# Altium PCB PIPOCPUD_2006.PCBDOC (part 5 of 10)
Units mm, origin at the board's own origin, x right, y up, seen from the top; angles counter-clockwise.
Board outline 179.96 x 114.94 mm, 2 copper layers (Top Layer, Top, Bottom Layer, Bottom), stack 1.341 mm thick; 247 components, 222 nets, 910 pads, 491 vias.
Unrouted connection lines stored in the file: 2.
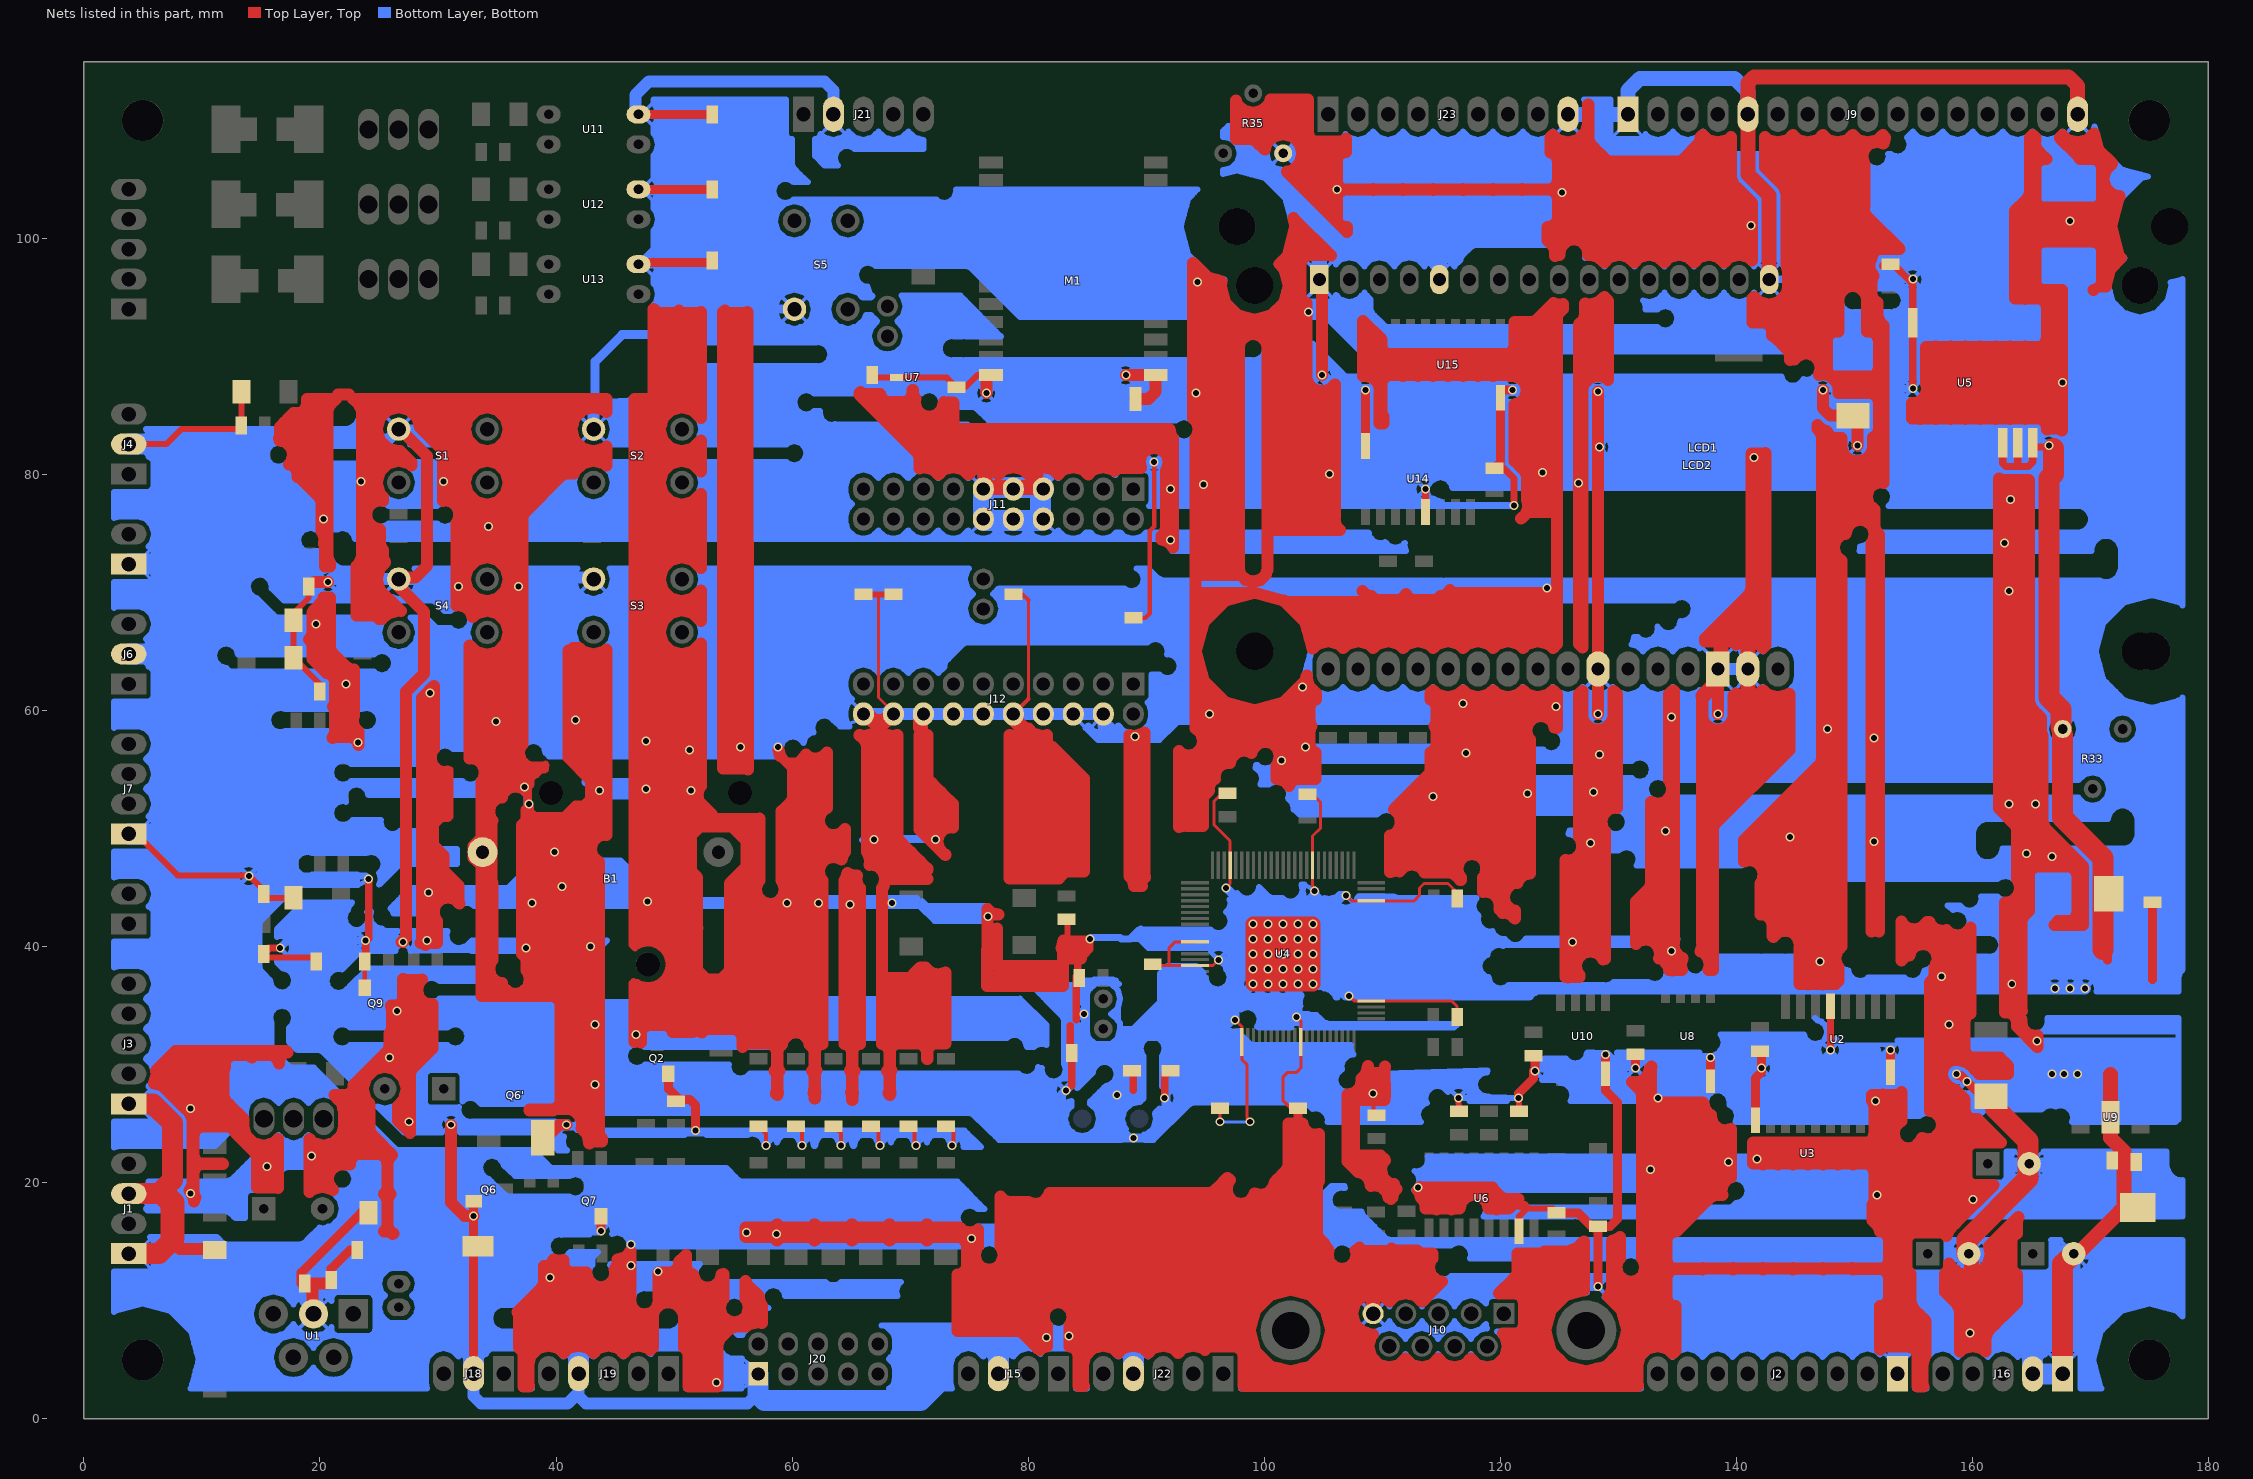
[diagram p5: the nets of this part, all layers, seen from the top]

## Via types
v1: diameter 0.762, hole 0.508, Top Layer, Top to Bottom Layer, Bottom, 489 vias
v2: diameter 0.864, hole 0.813, Top Layer, Top to Bottom Layer, Bottom, 2 vias

## Nets (pads, with @x,y where several pads share a name; then routed paths per layer and width w, separated by ;. In a path a pad name is that pad's centre, name@x,y a point inside that pad or via, vN(x,y) a via of type N, cw(c..) or ccw(c..) an arc to the next point about the centre after c; other vN are vias at no path point) (continued)
GND: (continued)
  Top Layer, Top w1.778: J1.1@3.81,13.97 6.35,13.97 6.985,14.605 7.62,15.24 7.62,18.288 6.858,19.05 6.35,19.05 ; J1.3@3.81,19.05 6.02,19.05 6.35,19.05 ; J3.1@3.81,26.67 5.842,26.67 7.493,25.019 7.493,20.193 6.35,19.05 ; C37.2@159.69,13.97 159.512,13.97 159.512,15.113 164.719,20.32 164.719,21.463 164.719,21.514 C40.2@164.795,21.59 164.719,21.666 164.719,21.717 164.719,23.495 161.925,26.289 161.925,27.305 C25.2@161.544,27.305 ; 166.878,82.169 166.878,80.01 166.497,79.629 166.497,61.087 167.513,60.071 R33.3@167.513,58.547 ; J16.1@167.64,3.785 167.64,13.081 C38.2@168.58,13.97 ; R33.3@167.64,57.912 167.64,50.927 171.069,47.498 171.069,39.751
  Bottom Layer, Bottom w0.254: v1(96.266,25.146) v1(98.806,25.146) ; 98.425,38.862 98.552,38.862 v1(99.06,39.37) ; 102.743,34.544 102.743,35.052 ; 148.819,31.75 154.051,31.75 ; 149.098,31.623 153.416,31.623 152.375,31.623 ; 152.654,31.445 152.654,31.623
  Bottom Layer, Bottom w0.305: J1.3@4.851,18.593 5.461,17.983 ; J1.3@4.851,19.482 5.486,20.091 ; J6.2@4.851,64.313 5.461,63.703 ; J6.2@4.851,65.202 5.461,65.811 ; J4.2@4.851,82.093 5.461,81.483 ; J4.2@4.851,82.982 5.461,83.591 ; J1.1@5.156,13.233 5.715,12.649 ; J1.1@5.156,14.707 5.715,15.265 ; J3.1@5.156,25.933 5.715,25.349 ; J3.1@5.156,27.407 5.715,27.965 ; J7.1@5.156,48.793 5.715,48.209 ; J7.1@5.156,50.267 5.715,50.825 ; J5.1@5.156,71.653 5.715,71.069 ; J5.1@5.156,73.127 5.715,73.685 ; 18.136,7.544 U1.3@18.821,8.23 ; 18.136,10.16 U1.3@18.821,9.474 ; U1.3@20.066,8.23 20.752,7.544 ; U1.3@20.066,9.474 20.752,10.16 ; 25.527,69.977 S4.1@26.162,70.612 ; 25.527,82.677 S1.1@26.162,83.312 ; 25.527,84.938 S1.1@26.162,84.303 ; S4.1@27.153,70.612 27.788,69.977 ; S1.1@27.153,83.312 27.788,82.677 ; S1.1@27.153,84.303 27.788,84.938 ; 31.953,5.461 J18.2@32.563,4.851 ; J18.2@33.452,4.851 34.061,5.461 ; 40.843,5.461 J19.4@41.453,4.851 ; 42.037,69.977 S3.1@42.672,70.612 ; 42.037,82.677 S2.1@42.672,83.312 ; 42.037,84.938 S2.1@42.672,84.303 ; J19.4@42.342,4.851 42.951,5.461 ; S3.1@43.663,70.612 44.298,69.977 ; S2.1@43.663,83.312 44.298,82.677 ; S2.1@43.663,84.303 44.298,84.938 ; U13.2@47.625,97.409 48.26,96.774 ; U13.2@47.625,98.171 48.26,98.806 ; U12.2@47.625,103.759 48.26,103.124 ; U12.2@47.625,104.521 48.26,105.156 ; U11.2@47.625,110.109 48.26,109.474 ; U11.2@47.625,110.871 48.26,111.506 ; 55.702,2.54 J20.1@56.439,2.946 ; 55.728,5.08 J20.1@56.439,4.623 ; 59.055,92.837 S5.1@59.69,93.472 ; 59.055,95.098 S5.1@59.69,94.463 ; S5.1@60.681,93.472 61.316,92.837 ; S5.1@60.681,94.463 61.316,95.098 ; 62.433,108.814 J21.2@63.043,109.423 ; J21.2@63.932,109.423 64.541,108.814 ; 64.059,58.649 J12.20@65.583,59.131 ; 64.973,60.833 J12.20@65.583,60.223 ; 75.133,75.032 J11.12@75.743,75.641 ; 75.133,79.883 J11.11@75.743,79.273 ; 76.403,5.461 J15.3@77.013,4.851 ; J11.12@76.632,75.641 77.241,75.032 ; J11.11@76.632,79.273 77.241,79.883 ; 77.673,75.032 J11.10@78.283,75.641 ; 77.673,79.883 J11.9@78.283,79.273 ; J15.3@77.902,4.851 78.511,5.461 ; J11.10@79.172,75.641 79.781,75.032 ; J11.9@79.172,79.273 79.781,79.883 ; 80.213,75.032 J11.8@80.823,75.641 ; 80.213,79.883 J11.7@80.823,79.273 ; J11.8@81.712,75.641 82.321,75.032 ; J11.7@81.712,79.273 82.321,79.883 ; J12.6@84.252,59.131 84.861,58.522 ; 85.293,58.522 J12.4@85.903,59.131 ; J12.4@86.792,59.131 87.401,58.522 ; 87.833,5.461 J22.4@88.443,4.851 ; J22.4@89.332,4.851 89.941,5.461 ; 100.609,106.197 R35.3@101.219,106.807 ; 100.609,108.153 R35.3@101.219,107.569 ; R35.3@101.981,106.807 102.565,106.197 ; R35.3@101.981,107.569 102.565,108.153 ; 103.454,94.818 LCD2.1@104.038,95.402 ; 103.454,98.146 LCD2.1@104.038,97.587 ; LCD2.1@105.308,95.402 105.867,94.818 ; LCD2.1@105.308,97.587 105.867,98.146 ; 108.153,7.823 J10.5@108.763,8.433 ; 108.153,9.931 J10.5@108.763,9.322 ; J10.5@109.652,8.433 110.261,7.823 ; J10.5@109.652,9.322 110.261,9.931 ; 113.843,97.917 LCD2.5@114.427,97.333 ; LCD2.5@115.214,97.333 115.799,97.917 ; 124.663,108.814 J23.9@125.273,109.423 ; J23.9@126.162,109.423 126.771,108.814 ; 127.127,61.849 LCD1.5@127.762,62.484 ; LCD1.5@128.753,62.484 129.388,61.849 ; 129.489,108.56 J9.1@130.073,109.144 ; J9.1@131.547,109.144 132.105,108.56 ; 137.008,61.57 LCD1.1@137.592,62.154 ; 137.008,65.405 LCD1.1@137.592,64.846 ; LCD1.1@139.268,62.154 139.827,61.57 ; LCD1.1@139.268,64.846 139.827,65.405 ; 139.954,61.722 LCD1.16@140.462,62.484 ; 140.132,65.43 LCD1.16@140.462,64.491 ; LCD1.16@141.453,62.484 142.088,61.849 ; LCD1.16@141.453,64.491 142.088,65.126 ; 141.783,95.047 LCD2.16@142.367,95.631 ; 141.783,97.917 LCD2.16@142.367,97.333 ; LCD2.16@143.154,95.631 143.739,95.047 ; LCD2.16@143.154,97.333 143.739,97.917 ; 152.324,5.69 J2.1@152.908,5.131 ; J2.1@154.381,5.131 154.94,5.69 ; 158.547,12.827 C37.2@159.182,13.462 ; 158.547,15.088 C37.2@159.182,14.453 ; C37.2@160.172,13.462 160.807,12.827 ; C37.2@160.172,14.453 160.807,15.088 ; 163.551,22.631 C40.2@164.287,22.073 ; 163.652,20.447 C40.2@164.287,21.082 ; 164.033,5.436 J16.2@164.643,4.826 ; C40.2@165.278,21.082 165.913,20.447 ; C40.2@165.278,22.073 166.014,22.631 ; J16.2@165.532,4.826 166.141,5.436 ; 166.319,5.69 J16.1@166.903,5.131 ; 166.649,57.429 R33.3@167.259,58.039 ; 166.649,59.385 R33.3@167.259,58.801 ; 167.437,12.827 C38.2@168.072,13.462 ; 167.437,15.088 C38.2@168.072,14.453 ; 167.843,108.814 J9.16@168.453,109.423 ; R33.3@168.021,58.039 168.605,57.429 ; R33.3@168.021,58.801 168.605,59.385 ; J16.1@168.377,5.131 168.935,5.69 ; C38.2@169.062,13.462 169.697,12.827 ; C38.2@169.062,14.453 169.697,15.088 ; J9.16@169.342,109.423 169.951,108.814
  Bottom Layer, Bottom w0.381: 13.259,45.263 v1@13.767,45.771 ; 13.259,46.66 v1@13.767,46.152 ; v1@14.148,45.771 14.656,45.263 ; v1@14.148,46.152 14.656,46.66 ; v1@16.815,39.675 17.323,39.167 ; v1@16.815,40.056 17.323,40.564 ; 19.99,70.155 v1@20.498,70.663 ; 19.99,71.552 v1@20.498,71.044 ; v1@20.879,70.663 21.387,70.155 ; v1@20.879,71.044 21.387,71.552 ; 23.165,39.802 v1@23.673,40.31 ; 23.165,41.199 v1@23.673,40.691 ; 23.241,45.187 v1@23.927,45.517 ; v1@24.054,40.31 24.562,39.802 ; v1@24.054,40.691 24.562,41.199 ; 26.34,39.675 v1@26.848,40.183 ; 26.34,41.072 v1@26.848,40.564 ; v1@27.229,40.183 27.737,39.675 ; v1@27.229,40.564 27.737,41.072 ; 30.353,24.232 v1@30.912,24.689 ; 30.404,25.578 v1@30.912,25.07 ; v1@31.293,24.689 31.852,24.232 ; v1@31.293,25.07 31.801,25.578 ; 32.309,16.434 v1@32.817,16.942 ; 32.309,17.831 v1@32.817,17.323 ; v1@33.198,16.942 33.706,16.434 ; v1@33.198,17.323 33.706,17.831 ; 40.183,24.181 v1@40.691,24.689 ; 43.104,16.561 v1@43.612,16.053 ; v1@43.993,16.053 44.501,16.561 ; 57.252,23.978 v1@57.582,23.292 ; v1@57.963,23.292 58.471,23.8 ; 60.3,23.978 v1@60.63,23.292 ; v1@61.011,23.292 61.519,23.8 ; 63.602,23.978 v1@63.932,23.292 ; v1@64.313,23.292 64.821,23.8 ; 66.904,23.978 v1@67.234,23.292 ; v1@67.615,23.292 68.123,23.8 ; 69.952,23.978 v1@70.282,23.292 ; v1@70.663,23.292 71.171,23.8 ; 73,23.978 v1@73.33,23.292 ; v1@73.711,23.292 74.219,23.8 ; 75.743,86.157 v1@76.251,86.665 ; 75.743,87.554 v1@76.251,87.046 ; v1@76.632,86.665 77.14,86.157 ; v1@76.632,87.046 77.14,87.554 ; 82.474,27.102 v1@82.982,27.61 ; 82.474,28.499 v1@82.982,27.991 ; v1@83.363,27.991 83.871,28.499 ; 83.998,33.579 v1@84.506,34.087 ; 83.998,34.976 v1@84.506,34.468 ; 87.554,87.681 v1@88.062,88.189 ; 87.554,89.078 v1@88.062,88.57 ; 88.189,24.435 v1@88.697,23.927 ; v1@88.443,88.189 88.951,87.681 ; v1@88.443,88.57 88.951,89.078 ; 89.967,80.315 v1@90.475,80.823 ; 89.967,81.712 v1@90.475,81.204 ; v1@90.856,80.823 91.364,80.315 ; v1@90.856,81.204 91.364,81.712 ; v1@91.745,26.975 92.253,26.467 ; v1@91.745,27.356 92.253,27.864 ; 95.428,39.548 v1@95.936,39.04 ; v1@96.317,38.659 96.825,38.151 ; v1@96.317,39.04 96.825,39.548 ; 96.825,33.071 v1@97.333,33.579 ; 96.825,34.468 v1@97.333,33.96 ; v1@96.952,44.755 97.46,44.247 ; 98.171,37.567 v1@98.857,37.897 ; 98.171,38.837 v1@98.857,39.167 ; 98.171,40.107 v1@98.857,40.437 ; 98.171,41.377 v1@98.857,41.707 ; 98.273,37.465 v1@98.857,37.008 ; 98.273,38.735 v1@98.857,38.278 ; 98.273,40.005 v1@98.857,39.548 ; 98.273,41.275 v1@98.857,40.818 ; 98.349,36.119 v1@98.857,36.627 ; 98.349,42.596 v1@98.857,42.088 ; v1@99.238,36.627 99.568,35.941 ; v1@99.238,42.088 99.695,42.672 ; 99.695,36.043 v1@100.127,36.627 ; 99.797,42.774 v1@100.127,42.088 ; v1@100.508,36.627 100.838,35.941 ; v1@100.508,42.088 100.965,42.672 ; 100.965,36.043 v1@101.397,36.627 ; 101.067,42.774 v1@101.397,42.088 ; v1@101.778,36.627 102.108,35.941 ; v1@101.778,42.088 102.235,42.672 ; 102.032,33.325 v1@102.54,33.833 ; 102.032,34.722 v1@102.54,34.214 ; 102.235,36.043 v1@102.667,36.627 ; 102.337,42.774 v1@102.667,42.088 ; v1@102.921,33.833 103.429,33.325 ; v1@103.048,42.088 103.505,42.672 ; 103.403,45.237 v1@104.064,44.856 ; 103.556,43.967 v1@104.064,44.475 ; 103.607,42.774 v1@103.937,42.088 ; 104.191,87.681 v1@104.699,88.189 ; 104.191,89.078 v1@104.699,88.57 ; v1@104.318,37.008 105.004,37.338 ; v1@104.318,37.897 104.902,37.465 ; v1@104.318,38.278 105.004,38.608 ; v1@104.318,39.167 104.902,38.735 ; v1@104.318,39.548 105.004,39.878 ; v1@104.318,40.437 104.902,40.005 ; v1@104.318,40.818 105.004,41.148 ; v1@104.318,41.707 104.902,41.275 ; v1@104.318,42.088 104.826,42.596 ; v1@104.445,44.475 104.953,43.967 ; v1@105.08,88.189 105.588,87.681 ; v1@105.08,88.57 105.588,89.078 ; 106.223,43.612 v1@106.731,44.12 ; 106.477,36.5 v1@106.985,35.992 ; v1@107.112,44.12 107.62,43.612 ; v1@107.366,35.992 107.874,36.5 ; 107.874,86.411 v1@108.382,86.919 ; 107.874,87.808 v1@108.382,87.3 ; v1@108.763,86.919 109.271,86.411 ; v1@108.763,87.3 109.271,87.808 ; 112.954,78.029 v1@113.462,78.537 ; 112.954,79.426 v1@113.462,78.918 ; v1@113.843,78.537 114.173,77.851 ; v1@113.843,78.918 114.3,79.502 ; 115.748,27.864 v1@116.256,27.356 ; v1@116.637,27.356 117.145,27.864 ; 120.32,86.411 v1@120.828,86.919 ; 120.32,87.808 v1@120.828,87.3 ; v1@121.209,86.919 121.717,86.411 ; v1@121.209,87.3 121.717,87.808 ; v1@123.114,29.261 123.622,28.753 ; v1@123.114,29.642 123.622,30.15 ; 127.559,11.862 v1@128.067,11.354 ; 127.559,58.979 v1@128.067,59.487 ; 127.559,60.376 v1@128.067,59.868 ; 127.559,86.284 v1@128.067,86.792 ; 127.559,87.681 v1@128.067,87.173 ; 127.686,81.585 v1@128.194,82.093 ; 127.686,82.982 v1@128.194,82.474 ; 128.194,30.15 v1@128.702,30.658 ; v1@128.448,10.973 128.956,10.465 ; v1@128.448,11.354 128.956,11.862 ; v1@128.448,59.487 128.956,58.979 ; v1@128.448,59.868 128.956,60.376 ; v1@128.448,86.792 128.956,86.284 ; v1@128.448,87.173 128.956,87.681 ; v1@128.575,82.093 129.083,81.585 ; v1@128.575,82.474 129.083,82.982 ; v1@129.083,30.658 129.591,30.15 ; 130.734,29.007 v1@131.242,29.515 ; 130.734,30.404 v1@131.242,29.896 ; v1@131.623,29.515 132.131,29.007 ; v1@131.623,29.896 132.131,30.404 ; 137.084,29.896 v1@137.592,30.404 ; 137.719,58.979 v1@138.227,59.487 ; 137.719,60.376 v1@138.227,59.868 ; v1@137.973,30.404 138.481,29.896 ; v1@137.973,30.785 138.659,31.115 ; v1@138.608,59.487 139.116,58.979 ; v1@138.608,59.868 139.116,60.376 ; 141.402,29.007 v1@141.91,29.515 ; 141.402,30.404 v1@141.91,29.896 ; v1@142.291,29.515 142.799,29.007 ; v1@142.291,29.896 142.799,30.404 ; 146.609,86.411 v1@147.117,86.919 ; 146.609,87.808 v1@147.117,87.3 ; 147.168,31.852 v1@147.752,31.42 ; 147.244,30.531 v1@147.752,31.039 ; v1@147.498,86.919 148.006,86.411 ; v1@147.498,87.3 148.006,87.808 ; v1@148.133,31.039 148.641,30.531 ; v1@148.133,31.42 148.641,31.928 ; 149.53,81.712 v1@150.038,82.22 ; 149.53,83.109 v1@150.038,82.601 ; v1@150.419,82.22 150.927,81.712 ; v1@150.419,82.601 150.927,83.109 ; 152.324,30.531 v1@152.832,31.039 ; v1@153.213,31.039 153.721,30.531 ; v1@153.213,31.42 153.721,31.928 ; 154.229,86.538 v1@154.737,87.046 ; 154.229,87.935 v1@154.737,87.427 ; 154.229,95.809 v1@154.737,96.317 ; 154.229,97.206 v1@154.737,96.698 ; v1@155.118,87.046 155.626,86.538 ; v1@155.118,87.427 155.626,87.935 ; v1@155.118,96.317 155.626,95.809 ; v1@155.118,96.698 155.626,97.206 ; 157.912,28.499 v1@158.42,29.007 ; 157.912,29.896 v1@158.42,29.388 ; 158.801,27.864 v1@159.309,28.372 ; v1@158.801,29.388 159.309,29.896 ; v1@159.69,28.372 160.198,27.864 ; v1@159.69,28.753 160.198,29.261 ; 165.786,81.712 v1@166.294,82.22 ; 165.786,83.109 v1@166.294,82.601 ; 166.04,28.499 v1@166.548,29.007 ; 166.04,29.896 v1@166.548,29.388 ; 166.294,37.135 v1@166.802,36.627 ; v1@166.675,82.22 167.183,81.712 ; v1@166.675,82.601 167.183,83.109 ; 166.751,30.226 v1@167.564,29.388 ; v1@166.929,29.388 167.767,30.226 ; v1@167.183,36.627 167.64,37.211 ; 167.742,37.313 v1@168.072,36.627 ; v1@167.945,29.007 168.275,28.321 ; v1@167.945,29.388 168.326,30.023 ; 168.326,28.372 v1@168.707,29.007 ; 168.377,30.074 v1@168.707,29.388 ; v1@168.453,36.627 168.91,37.211 ; 169.012,37.313 v1@169.342,36.627 ; v1@169.088,29.007 169.596,28.499 ; v1@169.088,29.388 169.596,29.896 ; v1@169.723,36.627 170.231,37.135